# EAGLE board CircularControllerBase (EAGLE 8.0.0)
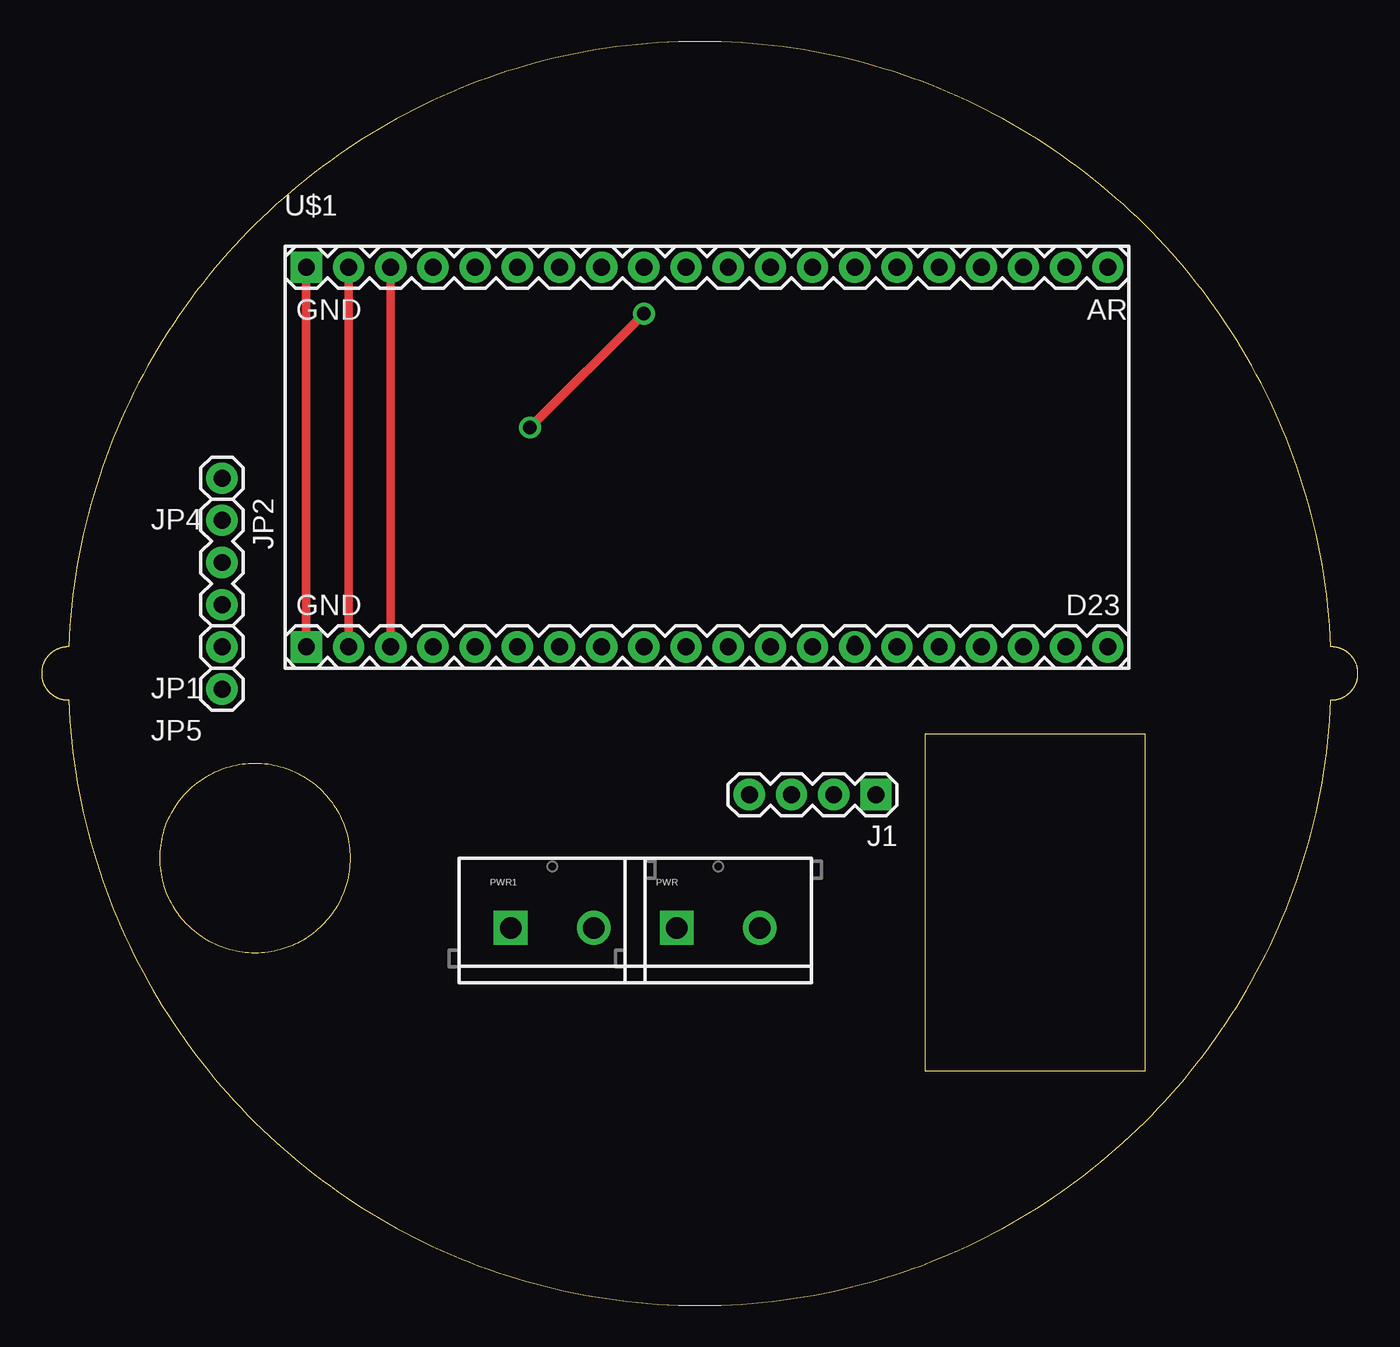
[diagram p0: board, top side]
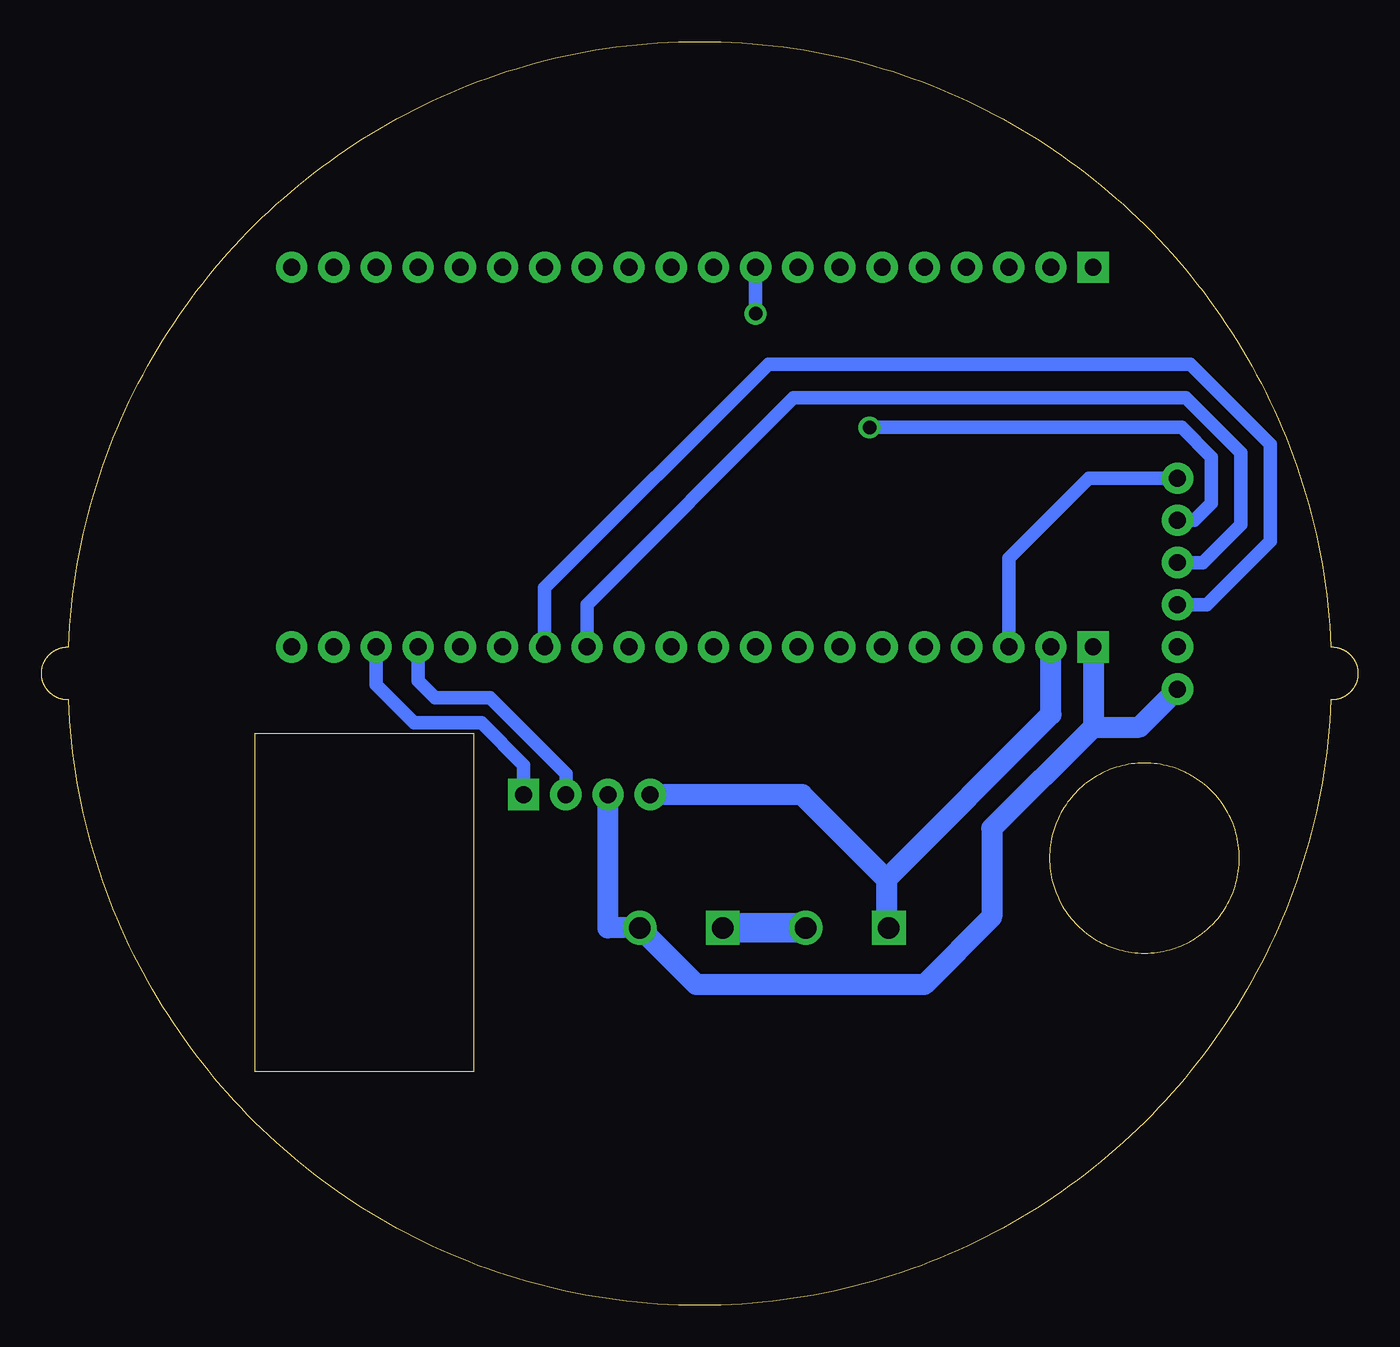
[diagram p1: board, bottom side, seen from below]

Size 79.27 x 76.07 mm. Coordinates in mm from the lower left corner, seen from the top.
Outline: 77.66,39.63 77.67,39.63 77.67,39.63 77.7,39.63 77.73,39.63 77.75,39.63 77.78,39.63 77.81,39.63 77.86,39.62 77.89,39.62 77.91,39.62 77.94,39.61 77.97,39.61 77.99,39.6 78.02,39.6 78.04,39.59 78.07,39.58 78.1,39.58 78.12,39.57 78.15,39.56 78.17,39.55 78.2,39.55 78.22,39.54 78.24,39.53 78.27,39.52 78.29,39.51 78.32,39.5 78.34,39.49 78.36,39.48 78.39,39.47 78.41,39.45 78.43,39.44 78.45,39.43 78.48,39.42 78.5,39.4 78.52,39.39 78.54,39.38 78.56,39.36 78.59,39.35 78.61,39.33 78.63,39.32 78.65,39.3 78.67,39.29 78.69,39.27 78.71,39.25 78.73,39.24 78.74,39.22 78.76,39.2 78.78,39.18 78.8,39.17 78.82,39.15 78.84,39.13 78.85,39.11 78.87,39.09 78.89,39.07 78.9,39.05 78.92,39.03 78.94,39.01 78.95,38.99 78.97,38.97 78.98,38.95 79.01,38.91 79.02,38.89 79.04,38.86 79.05,38.84 79.06,38.82 79.07,38.8 79.09,38.78 79.1,38.75 79.11,38.73 79.12,38.71 79.13,38.68 79.14,38.66 79.15,38.63 79.16,38.61 79.18,38.56 79.19,38.54 79.2,38.51 79.2,38.49 79.21,38.46 79.22,38.41 79.23,38.38 79.24,38.36 79.24,38.33 79.25,38.31 79.25,38.28 79.25,38.25 79.26,38.23 79.26,38.17 79.26,38.15 79.27,38.09 79.27,38.06 79.27,38.01 79.27,37.98 79.26,37.93 79.26,37.9 79.26,37.87 79.26,37.85 79.25,37.82 79.25,37.79 79.25,37.77 79.24,37.74 79.24,37.71 79.23,37.69 79.22,37.66 79.21,37.61 79.2,37.59 79.2,37.56 79.19,37.54 79.18,37.51 79.17,37.49 79.16,37.46 79.15,37.44 79.14,37.42 79.13,37.39 79.12,37.37 79.11,37.34 79.1,37.32 79.09,37.3 79.07,37.28 79.06,37.25 79.05,37.23 79.04,37.21 79.02,37.19 79.01,37.16 78.98,37.12 78.97,37.1 78.95,37.08 78.94,37.06 78.92,37.04 78.9,37.02 78.89,37 78.87,36.98 78.85,36.96 78.84,36.94 78.82,36.93 78.8,36.91 78.78,36.89 78.76,36.87 78.74,36.85 78.73,36.84 78.71,36.82 78.69,36.8 78.67,36.79 78.65,36.77 78.63,36.76 78.61,36.74 78.59,36.73 78.54,36.7 78.52,36.68 78.5,36.67 78.48,36.66 78.45,36.64 78.41,36.62 78.39,36.61 78.36,36.6 78.34,36.59 78.32,36.57 78.29,36.56 78.27,36.55 78.24,36.55 78.22,36.54 78.2,36.53 78.17,36.52 78.15,36.51 78.12,36.5 78.1,36.5 78.07,36.49 78.04,36.48 78.02,36.48 77.99,36.47 77.97,36.47 77.94,36.46 77.91,36.46 77.89,36.45 77.86,36.45 77.83,36.45 77.81,36.44 77.78,36.44 77.75,36.44 77.73,36.44 77.7,36.44 77.66,36.44
Outline: 77.66,39.63 77.66,39.63
Outline: 77.66,39.63 77.66,39.63 77.66,39.63 77.66,39.63
Outline: 77.66,39.63 77.66,39.63
Outline: 77.66,39.63 77.66,39.63
Outline: 77.66,39.63 77.66,39.63
Outline: 77.66,39.63 77.66,39.63 77.66,39.63 77.66,39.63 77.65,39.63 77.65,39.63 77.65,39.63 77.65,39.63 77.65,39.63 77.65,39.63
Outline: 77.65,39.63 77.65,39.63
Outline: 77.65,39.63 77.65,39.63 77.65,39.63 77.65,39.63
Outline: 77.65,39.63 77.65,39.63
Outline: 77.65,39.63 77.64,39.63
Outline: 77.64,39.63 77.64,39.63
Outline: 77.64,39.63 77.64,39.63 77.64,39.63
Outline: 77.64,39.63 77.64,39.63
Outline: 77.64,39.63 77.64,39.63
Outline: 77.64,39.63 77.64,39.63 77.64,39.63 77.64,39.63 77.63,39.63 77.61,40.26 77.57,40.89 77.51,41.52 77.45,42.14 77.38,42.76 77.3,43.38 77.21,44 77.11,44.61 76.99,45.21 76.88,45.82 76.75,46.42 76.6,47.02 76.46,47.61 76.3,48.2 76.13,48.79 75.96,49.37 75.77,49.95 75.57,50.52 75.37,51.09 75.16,51.66 74.94,52.22 74.71,52.78 74.47,53.33 74.22,53.87 73.97,54.42 73.71,54.96 73.44,55.49 73.16,56.02 72.87,56.55 72.57,57.06 72.28,57.58 71.96,58.09 71.64,58.59 71.32,59.09 70.99,59.58 70.3,60.55 69.94,61.03 69.58,61.5 69.21,61.96 68.83,62.42 68.44,62.87 68.06,63.32 67.66,63.76 67.25,64.19 66.84,64.62 66.43,65.04 66,65.45 65.57,65.86 65.13,66.26 64.69,66.66 64.24,67.05 63.79,67.43 63.32,67.8 62.86,68.17 62.39,68.53 61.9,68.87 61.42,69.22 60.93,69.56 60.43,69.89 59.94,70.21 59.43,70.53 58.92,70.83 58.4,71.13 57.88,71.42 57.35,71.7 56.82,71.98 56.29,72.25 55.74,72.5 55.2,72.76 54.65,73 54.09,73.23 53.53,73.46 52.97,73.67 52.4,73.88 51.83,74.08 51.25,74.27 50.67,74.45 50.09,74.62 49.5,74.79 48.91,74.93 48.31,75.08 47.71,75.22 47.11,75.34 46.51,75.46 45.9,75.57 45.28,75.66 44.67,75.75 44.05,75.82 43.43,75.89 42.8,75.95 42.17,75.99 41.54,76.03 40.91,76.06 40.27,76.07 38.99,76.07 38.36,76.06 37.73,76.03 37.09,75.99 36.47,75.95 35.84,75.89 35.22,75.82 34.6,75.75 33.99,75.66 33.37,75.57 32.76,75.46 32.16,75.34 31.55,75.22 30.95,75.08 30.36,74.93 29.77,74.79 29.18,74.62 28.6,74.45 28.01,74.27 27.44,74.08 26.87,73.88 26.3,73.67 25.73,73.46 25.18,73.23 24.62,73 24.07,72.76 23.53,72.5 22.98,72.25 22.45,71.98 21.92,71.7 21.39,71.42 20.87,71.13 20.35,70.83 19.84,70.53 19.33,70.21 18.83,69.89 18.34,69.56 17.85,69.22 17.36,68.87 16.88,68.53 16.41,68.17 15.95,67.8 15.48,67.43 15.03,67.05 14.58,66.66 14.13,66.26 13.7,65.86 12.84,65.04 12.42,64.62 12.02,64.19 11.61,63.76 11.21,63.32 10.82,62.87 10.44,62.42 10.06,61.96 9.69,61.5 9.33,61.03 8.97,60.55 8.28,59.58 7.95,59.09 7.63,58.59 7.3,58.09 6.99,57.58 6.69,57.06 6.39,56.55 6.11,56.02 5.83,55.49 5.56,54.96 5.29,54.42 5.04,53.87 4.79,53.33 4.56,52.78 4.33,52.22 4.11,51.66 3.9,51.09 3.7,50.52 3.5,49.95 3.31,49.37 3.14,48.79 2.97,48.2 2.81,47.61 2.67,47.02 2.52,46.42 2.39,45.82 2.28,45.21 2.16,44.61 2.06,44 1.97,43.38 1.89,42.76 1.81,42.14 1.76,41.52 1.7,40.89 1.66,40.26 1.63,39.63 1.63,39.63 1.63,39.63 1.63,39.63 1.63,39.63
Outline: 1.63,39.63 1.63,39.63
Outline: 1.63,39.63 1.63,39.63
Outline: 1.63,39.63 1.63,39.63
Outline: 1.63,39.63 1.62,39.63
Outline: 1.62,39.63 1.62,39.63
Outline: 1.62,39.63 1.62,39.63
Outline: 1.62,39.63 1.62,39.63
Outline: 1.62,39.63 1.62,39.63
Outline: 1.62,39.63 1.62,39.63
Outline: 1.62,39.63 1.62,39.63 1.62,39.63 1.62,39.63
Outline: 1.62,39.63 1.62,39.63
Outline: 1.62,39.63 1.62,39.63 1.62,39.63
Outline: 1.62,39.63 1.62,39.63
Outline: 1.62,39.63 1.61,39.63 1.61,39.63 1.61,39.63
Outline: 1.61,39.63 1.61,39.63
Outline: 1.61,39.63 1.61,39.63 1.61,39.63
Outline: 1.61,39.63 1.61,39.63
Outline: 1.61,39.63 1.61,39.63
Outline: 1.61,39.63 1.61,39.63
Outline: 1.61,39.63 1.61,39.63 1.61,39.63 1.6,39.63
Outline: 1.6,39.63 1.6,39.63
Outline: 1.6,39.63 1.6,39.63
Outline: 1.6,39.63 1.6,39.63
Outline: 1.6,39.63 1.57,39.63 1.54,39.63 1.49,39.63 1.46,39.63 1.43,39.63 1.41,39.62 1.38,39.62 1.35,39.62 1.33,39.61 1.3,39.61 1.28,39.6 1.25,39.6 1.22,39.59 1.2,39.58 1.17,39.58 1.15,39.57 1.12,39.56 1.1,39.55 1.07,39.55 1.05,39.54 1.02,39.53 1,39.52 0.98,39.51 0.95,39.5 0.93,39.49 0.91,39.48 0.88,39.47 0.86,39.45 0.84,39.44 0.81,39.43 0.79,39.42 0.77,39.4 0.75,39.39 0.73,39.38 0.7,39.36 0.68,39.35 0.66,39.33 0.64,39.32 0.62,39.3 0.6,39.29 0.58,39.27 0.56,39.25 0.54,39.24 0.52,39.22 0.5,39.2 0.49,39.18 0.47,39.17 0.45,39.15 0.43,39.13 0.42,39.11 0.4,39.09 0.38,39.07 0.36,39.05 0.35,39.03 0.33,39.01 0.32,38.99 0.3,38.97 0.29,38.95 0.26,38.91 0.24,38.89 0.23,38.86 0.22,38.84 0.21,38.82 0.19,38.8 0.18,38.78 0.17,38.75 0.16,38.73 0.15,38.71 0.14,38.68 0.13,38.66 0.12,38.63 0.11,38.61 0.1,38.59 0.09,38.56 0.08,38.54 0.07,38.51 0.06,38.49 0.06,38.46 0.05,38.44 0.04,38.41 0.04,38.38 0.03,38.36 0.03,38.33 0.02,38.31 0.02,38.28 0.01,38.25 0.01,38.23 0.01,38.2 0.01,38.17 0,38.15 0,38.09 0,38.06 0,38.01 0,37.98 0,37.93 0.01,37.9 0.01,37.87 0.01,37.85 0.01,37.82 0.02,37.79 0.02,37.77 0.03,37.74 0.03,37.71 0.04,37.69 0.04,37.66 0.05,37.64 0.06,37.61 0.06,37.59 0.07,37.56 0.08,37.54 0.09,37.51 0.1,37.49 0.11,37.46 0.12,37.44 0.13,37.42 0.14,37.39 0.15,37.37 0.16,37.34 0.17,37.32 0.18,37.3 0.19,37.28 0.21,37.25 0.22,37.23 0.23,37.21 0.24,37.19 0.26,37.16 0.29,37.12 0.3,37.1 0.32,37.08 0.33,37.06 0.35,37.04 0.36,37.02 0.38,37 0.4,36.98 0.42,36.96 0.43,36.94 0.45,36.93 0.47,36.91 0.49,36.89 0.5,36.87 0.52,36.85 0.54,36.84 0.56,36.82 0.58,36.8 0.6,36.79 0.62,36.77 0.64,36.76 0.66,36.74 0.68,36.73 0.7,36.71 0.73,36.7 0.75,36.68 0.77,36.67 0.79,36.66 0.81,36.64 0.86,36.62 0.88,36.61 0.91,36.6 0.93,36.59 0.95,36.57 0.98,36.56 1,36.55 1.02,36.55 1.05,36.54 1.07,36.53 1.1,36.52 1.12,36.51 1.15,36.5 1.17,36.5 1.2,36.49 1.22,36.48 1.25,36.48 1.28,36.47 1.3,36.47 1.33,36.46 1.35,36.46 1.38,36.45 1.41,36.45 1.43,36.45 1.46,36.44 1.49,36.44 1.54,36.44 1.57,36.44 1.61,36.44
Outline: 1.61,36.44 1.61,36.44
Outline: 1.61,36.44 1.61,36.44 1.61,36.44 1.61,36.44
Outline: 1.61,36.44 1.61,36.44
Outline: 1.61,36.44 1.62,36.44
Outline: 1.62,36.44 1.62,36.44
Outline: 1.62,36.44 1.62,36.44 1.62,36.44 1.62,36.44
Outline: 1.62,36.44 1.62,36.44
Outline: 1.62,36.44 1.62,36.44 1.62,36.44 1.63,36.44 1.63,36.44 1.66,35.81 1.7,35.18 1.81,33.93 1.89,33.31 1.97,32.69 2.06,32.08 2.16,31.47 2.28,30.86 2.39,30.25 2.52,29.65 2.67,29.06 2.81,28.46 2.97,27.87 3.14,27.29 3.31,26.7 3.5,26.13 3.7,25.55 3.9,24.98 4.11,24.42 4.33,23.86 4.56,23.3 4.79,22.74 5.04,22.2 5.29,21.65 5.56,21.11 5.83,20.58 6.11,20.05 6.39,19.53 6.69,19.01 6.99,18.49 7.3,17.98 7.63,17.48 7.95,16.98 8.28,16.49 8.63,16.01 8.97,15.52 9.33,15.05 9.69,14.58 10.06,14.11 10.44,13.65 10.82,13.2 11.21,12.75 11.61,12.31 12.02,11.88 12.42,11.45 12.84,11.03 13.7,10.21 14.13,9.81 14.58,9.42 15.03,9.03 15.48,8.65 15.95,8.28 16.41,7.91 16.88,7.55 17.36,7.2 17.85,6.85 18.34,6.51 18.83,6.19 19.33,5.86 19.84,5.55 20.35,5.24 20.87,4.94 21.39,4.65 21.92,4.37 22.45,4.09 22.98,3.82 23.53,3.57 24.07,3.32 24.62,3.07 25.18,2.84 25.73,2.61 26.3,2.4 26.87,2.2 27.44,1.99 28.01,1.8 28.6,1.63 29.18,1.45 29.77,1.29 30.36,1.14 30.95,0.99 31.55,0.86 32.16,0.73 32.76,0.61 33.37,0.51 33.99,0.42 34.6,0.33 35.22,0.25 35.84,0.19 36.47,0.13 37.09,0.08 37.73,0.05 38.36,0.02 38.99,0 40.27,0 40.91,0.02 41.54,0.05 42.17,0.08 42.8,0.13 43.43,0.19 44.05,0.25 44.67,0.33 45.28,0.42 45.9,0.51 46.51,0.61 47.71,0.86 48.31,0.99 49.5,1.29 50.09,1.45 50.67,1.63 51.25,1.8 51.83,1.99 52.4,2.2 52.97,2.4 53.53,2.61 54.65,3.07 55.2,3.32 55.74,3.57 56.29,3.82 56.82,4.09 57.35,4.37 57.88,4.65 58.4,4.94 58.92,5.24 59.43,5.55 59.94,5.86 60.43,6.19 60.93,6.51 61.42,6.85 62.39,7.55 62.86,7.91 63.32,8.28 63.79,8.65 64.24,9.03 64.69,9.42 65.13,9.81 65.57,10.21 66,10.62 66.43,11.03 66.84,11.45 67.25,11.88 67.66,12.31 68.06,12.75 68.44,13.2 68.83,13.65 69.21,14.11 69.58,14.58 69.94,15.05 70.3,15.52 70.64,16.01 70.99,16.49 71.32,16.98 71.64,17.48 71.96,17.98 72.28,18.49 72.57,19.01 72.87,19.53 73.16,20.05 73.71,21.11 73.97,21.65 74.22,22.2 74.47,22.74 74.71,23.3 74.94,23.86 75.16,24.42 75.37,24.98 75.57,25.55 75.77,26.13 75.96,26.7 76.13,27.29 76.3,27.87 76.46,28.46 76.6,29.06 76.75,29.65 76.88,30.25 76.99,30.86 77.11,31.47 77.21,32.08 77.3,32.69 77.38,33.31 77.45,33.93 77.51,34.55 77.57,35.18 77.61,35.81 77.63,36.44 77.64,36.44 77.64,36.44 77.65,36.44 77.65,36.44
Outline: 77.65,36.44 77.65,36.44
Outline: 77.65,36.44 77.65,36.44 77.65,36.44 77.66,36.44
Outline: 77.66,36.44 77.66,36.44
Outline: 77.66,36.44 77.66,36.44 77.66,36.44
Outline: 77.66,36.44 77.66,36.44
Outline: 77.66,36.44 77.66,36.44
Outline: 18.57,26.73 18.56,26.53 18.54,26.34 18.52,26.15 18.49,25.96 18.42,25.58 18.37,25.4 18.32,25.22 18.26,25.04 18.2,24.87 18.05,24.53 17.97,24.36 17.8,24.04 17.7,23.88 17.6,23.73 17.49,23.58 17.38,23.43 17.27,23.29 17.15,23.15 17.03,23.01 16.9,22.88 16.77,22.75 16.63,22.63 16.49,22.51 16.35,22.4 16.21,22.29 16.05,22.18 15.9,22.08 15.74,21.99 15.58,21.9 15.42,21.81 15.25,21.73 15.08,21.66 14.91,21.58 14.74,21.52 14.56,21.46 14.38,21.41 14.2,21.36 14.01,21.32 13.82,21.29 13.63,21.26 13.44,21.24 13.25,21.22 13.06,21.21 12.66,21.21 12.47,21.22 12.27,21.24 12.08,21.26 11.89,21.29 11.71,21.32 11.52,21.36 11.34,21.41 11.16,21.46 10.98,21.52 10.8,21.58 10.63,21.66 10.46,21.73 10.3,21.81 10.13,21.9 9.97,21.99 9.81,22.08 9.66,22.18 9.51,22.29 9.36,22.4 9.22,22.51 9.08,22.63 8.95,22.75 8.69,23.01 8.56,23.15 8.45,23.29 8.33,23.43 8.22,23.58 8.12,23.73 8.02,23.88 7.92,24.04 7.83,24.2 7.74,24.36 7.66,24.53 7.52,24.87 7.46,25.04 7.4,25.22 7.34,25.4 7.3,25.58 7.26,25.77 7.22,25.96 7.19,26.15 7.17,26.34 7.15,26.53 7.14,26.73 7.14,27.12 7.15,27.31 7.17,27.51 7.19,27.7 7.22,27.89 7.26,28.07 7.3,28.26 7.34,28.44 7.4,28.62 7.46,28.8 7.52,28.98 7.66,29.32 7.74,29.48 7.83,29.65 7.92,29.81 8.02,29.97 8.12,30.12 8.22,30.27 8.33,30.42 8.45,30.56 8.56,30.7 8.69,30.83 8.95,31.09 9.08,31.22 9.22,31.33 9.36,31.45 9.51,31.56 9.81,31.76 9.97,31.86 10.13,31.95 10.3,32.04 10.46,32.12 10.63,32.19 10.8,32.26 10.98,32.33 11.16,32.38 11.34,32.44 11.52,32.48 11.71,32.52 11.89,32.56 12.08,32.59 12.27,32.61 12.47,32.63 12.66,32.64 13.06,32.64 13.25,32.63 13.44,32.61 13.63,32.59 13.82,32.56 14.01,32.52 14.2,32.48 14.38,32.44 14.56,32.38 14.74,32.33 14.91,32.26 15.08,32.19 15.25,32.12 15.42,32.04 15.58,31.95 15.74,31.86 15.9,31.76 16.21,31.56 16.35,31.45 16.49,31.33 16.63,31.22 16.77,31.09 16.9,30.96 17.03,30.83 17.15,30.7 17.27,30.56 17.38,30.42 17.49,30.27 17.6,30.12 17.7,29.97 17.8,29.81 17.88,29.65 17.97,29.48 18.05,29.32 18.2,28.98 18.26,28.8 18.32,28.62 18.37,28.44 18.42,28.26 18.49,27.89 18.52,27.7 18.54,27.51 18.56,27.31 18.57,27.12 18.57,26.73
Outline: 66.44,14.1 53.23,14.1 53.23,34.42 66.44,34.42 66.44,14.1
Copper layers (1*16): Top 0.035mm / dielectric 1.5mm / Bottom 0.035mm
Design rules "OthermillDRC_1_32_v2": minimum track width 8mil, minimum drill 0.8mm, track to track 0.794003125mm, track to pad 0.794003125mm, pad to pad 0.794003125mm, via to via 0.794003125mm, smd to smd 0mil, copper to edge 0mil, drill to drill 1mil, minimum pad ring 10mil, minimum via ring 10mil, stop-mask expansion 1mil, vias tented up to drill 30mil, thermal gap 10mil
Net classes: 0 default: width 0.203 mm

## Footprints (pad centres in the part's own frame; a part is rotated, then mirrored left to right if it is on the bottom)
1X04 = drill 1.016 pad 1.88 square: 1 0,0 | drill 1.016 pad 1.88: 2 2.54,0; 3 5.08,0; 4 7.62,0
1X01 = drill 1.016 pad 1.88: 1 0,0
1X03 = drill 1.016 pad 1.88: 1 0,0; 2 2.54,0; 3 5.08,0
SCREWTERMINAL-5MM-2 = drill 1.3 pad 2.032 square: 1 0,0 | drill 1.3 pad 2.032: 2 5,0
MEGA_SQ = drill 1.016 pad 1.88 square: 1 1.27,24.13; 21 1.27,1.27 | drill 1.016 pad 1.88: 2 3.81,24.13; 3 6.35,24.13; 4 8.89,24.13; 5 11.43,24.13; 6 13.97,24.13; 7 16.51,24.13; 8 19.05,24.13; 9 21.59,24.13; 10 24.13,24.13; 11 26.67,24.13; 12 29.21,24.13; 13 31.75,24.13; 14 34.29,24.13; 15 36.83,24.13; 16 39.37,24.13; 17 41.91,24.13; 18 44.45,24.13; 19 46.99,24.13; 20 49.53,24.13; 22 3.81,1.27; 23 6.35,1.27; 24 8.89,1.27; 25 11.43,1.27; 26 13.97,1.27; 27 16.51,1.27; 28 19.05,1.27; 29 21.59,1.27; 30 24.13,1.27; 31 26.67,1.27; 32 29.21,1.27; 33 31.75,1.27; 34 34.29,1.27; 35 36.83,1.27; 36 39.37,1.27; 37 41.91,1.27; 38 44.45,1.27; 39 46.99,1.27; 40 49.53,1.27

## Placement (x,y rotation side)
J1  [1X04]  50.24,30.74 180 top
JP1  ADDR  [1X01]  10.87,39.63 180 top
JP2  I2C  [1X03]  10.87,47.25 270 top
JP4  3.3V  [1X01]  10.87,49.79 180 top
JP5  GND  [1X01]  10.87,37.09 180 top
PWR  [SCREWTERMINAL-5MM-2]  38.25,22.72 0 top
PWR1  [SCREWTERMINAL-5MM-2]  28.25,22.72 0 top
U$1  MOTEINO_MEGA_MODULE  [MEGA_SQ]  14.68,38.36 0 top

## Library data of the parts
J1 = SparkFun-Connectors; PROD_ID: CONN-09696
JP1 JP2 JP4 JP5 = SparkFun
PWR PWR1 = SparkFun-Connectors; STOREFRONT_ID: PRT-08432
U$1 = MoteinoR4Mod

## Nets
3.3V: JP4.1 U$1.3 U$1.23
3.7V: J1.4 PWR1.1 U$1.2 U$1.22
ADDR: JP1.1
BAT+: PWR1.2 PWR.1
GND: J1.3 JP5.1 PWR.2 U$1.1 U$1.21
IRQ: JP2.1 U$1.9
LEDS_CI: J1.1 U$1.38
LEDS_DI: J1.2 U$1.37
SCL: JP2.2 U$1.33
SDA: JP2.3 U$1.34

## Tracks (layer width: path | path; a pad name or v marks a point on that pad's centre or on a via)
3.3V
  Top 0.508: U$1.3 U$1.23
  Bottom 0.813: U$1.23 21.03,44.97 16.2,49.79 JP4.1
3.7V  (via drill 0.81)
  Top 0.508: U$1.2 U$1.22
  Top 1.27: v28.39,22.87 PWR1.1
  Bottom 1.27: U$1.22 18.49,35.57 28.39,25.66 | 28.39,25.66 v28.39,22.87 | 28.39,25.66 33.47,30.74 J1.4
BAT+
  Bottom 1.778: PWR1.2 PWR.1
GND
  Top 0.508: U$1.1 U$1.21
  Bottom 1.27: J1.3 45.16,22.72 PWR.2 39.84,19.31 26.11,19.31 22.04,23.38 22.04,28.71 15.95,34.81 | U$1.21 15.95,34.81 | 15.95,34.81 13.15,34.81 JP5.1
IRQ  (via drill 0.81)
  Top 0.508: v29.41,52.84 v36.27,59.7
  Bottom 0.813: JP2.1 9.85,47.25 8.84,48.27 8.84,51.06 10.61,52.84 v29.41,52.84 | v36.27,59.7 U$1.9
LEDS_CI
  Bottom 0.813: J1.1 50.24,32.52 52.78,35.06 56.84,35.06 59.13,37.35 U$1.38
LEDS_DI
  Bottom 0.813: J1.2 47.7,32.01 52.27,36.59 55.57,36.59 56.59,37.6 U$1.37
SCL
  Bottom 0.813: JP2.2 9.34,44.71 7.06,47 7.06,51.32 10.36,54.62 33.98,54.62 46.43,42.17 U$1.33
SDA  (via drill 0.81)
  Top 0.508: v48.97,39.89 49.48,39.38 49.22,39.38 U$1.34
  Bottom 0.813: JP2.3 9.09,42.17 5.28,45.98 5.28,51.83 10.11,56.65 35.51,56.65 48.97,43.19 v48.97,39.89